# EAGLE board qo-100-pa-250W (EAGLE 9.6.2)
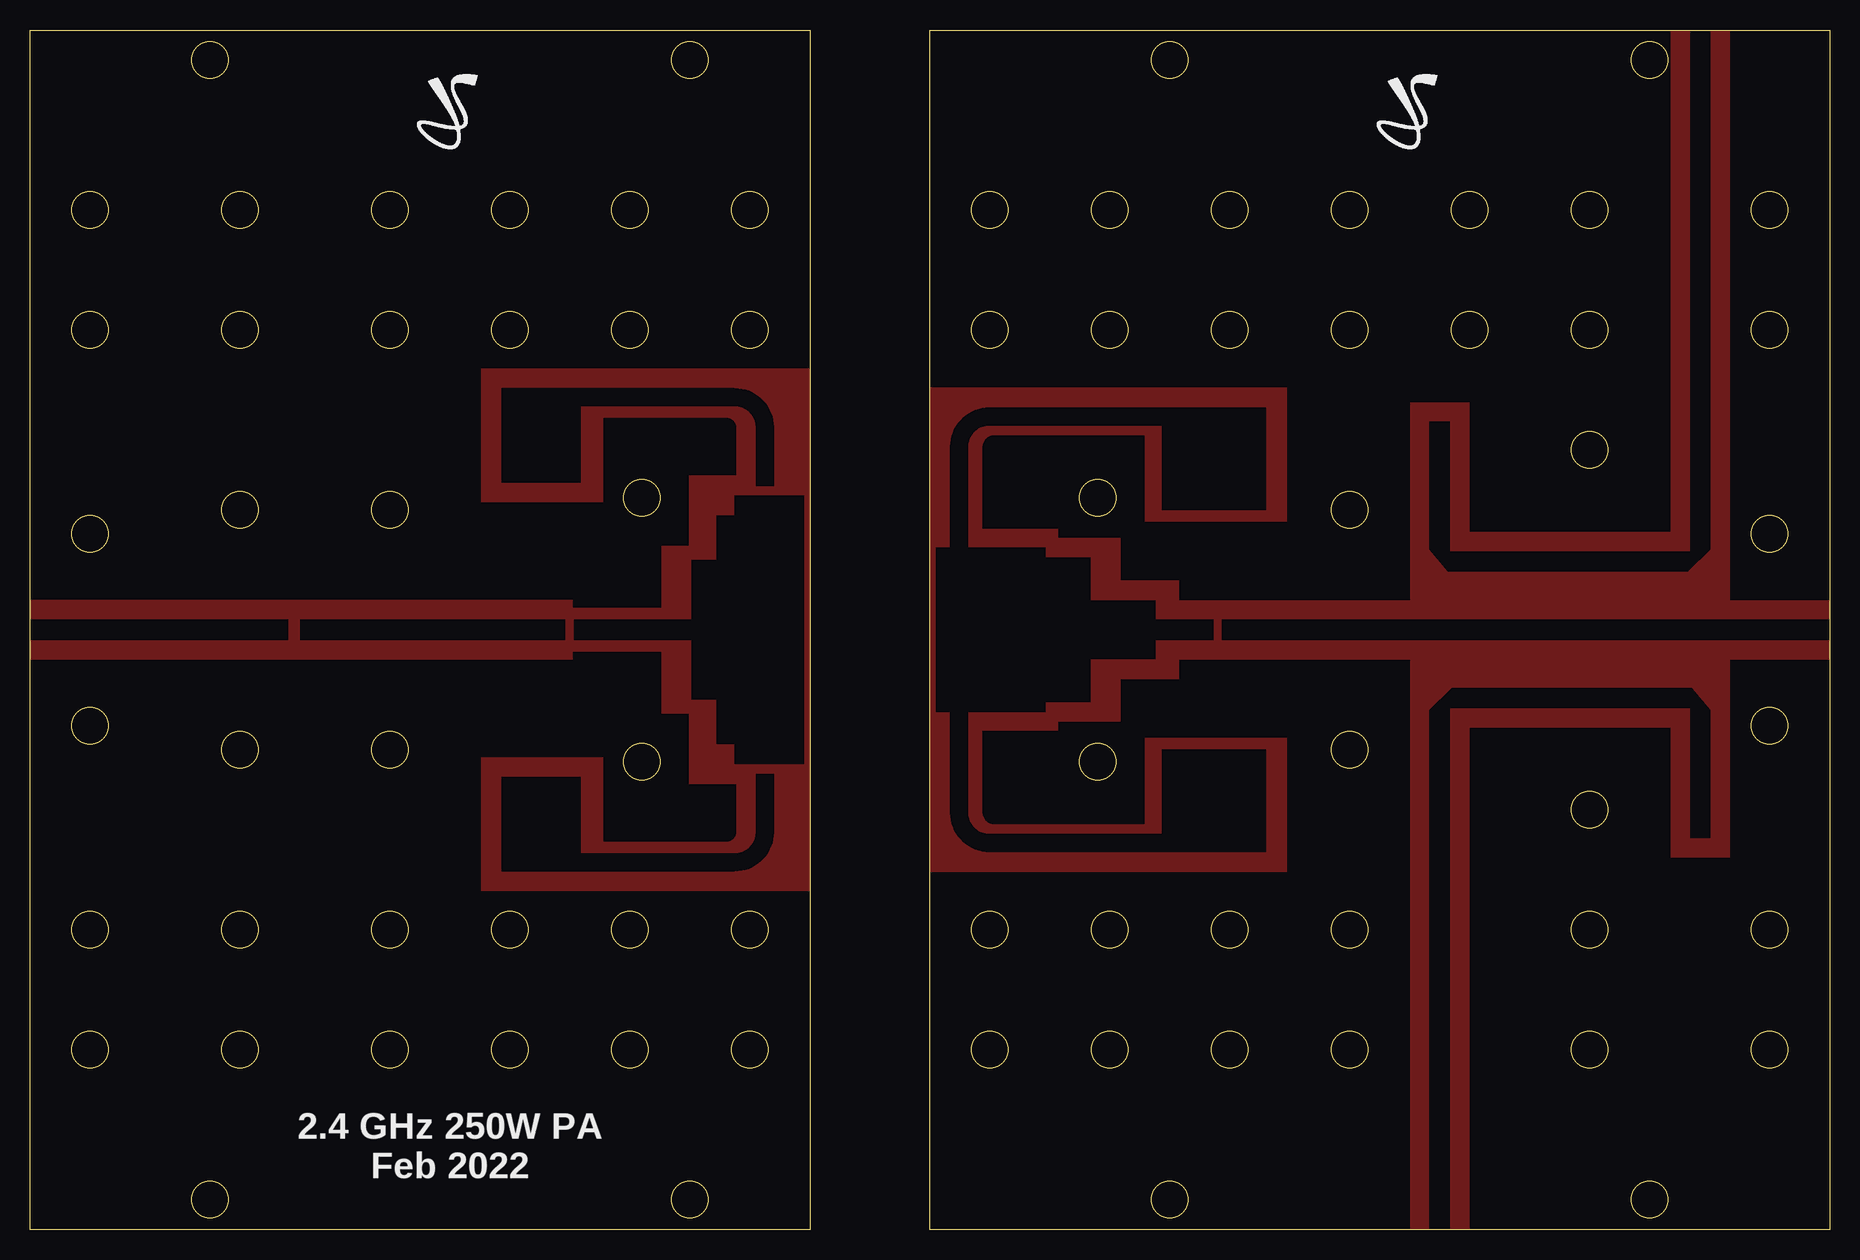
[diagram p0: board, top side]

Size 150 x 100 mm. Coordinates in mm from the lower left corner, seen from the top.
Outline: 0,0 0,100 65,100 65,0 0,0
Outline: 75,0 75,100 150,100 150,0 75,0
Outline: circle at 5,25 radius 1.5
Outline: circle at 17.5,25 radius 1.5
Outline: circle at 30,25 radius 1.5
Outline: circle at 40,25 radius 1.5
Outline: circle at 50,25 radius 1.5
Outline: circle at 60,25 radius 1.5
Outline: circle at 51,39 radius 1.5
Outline: circle at 30,40 radius 1.5
Outline: circle at 17.5,40 radius 1.5
Outline: circle at 5,42 radius 1.5
Outline: circle at 5,58 radius 1.5
Outline: circle at 17.5,60 radius 1.5
Outline: circle at 5,75 radius 1.5
Outline: circle at 17.5,75 radius 1.5
Outline: circle at 30,75 radius 1.5
Outline: circle at 40,75 radius 1.5
Outline: circle at 30,60 radius 1.5
Outline: circle at 51,61 radius 1.5
Outline: circle at 50,75 radius 1.5
Outline: circle at 60,75 radius 1.5
Copper layers (1*16): Top 0.035mm / dielectric 0.15mm / Bottom 0.035mm
Design rules "default *": minimum track width 6mil, minimum drill 0.35mm, track to track 0mil, track to pad 6mil, pad to pad 6mil, via to via 6mil, smd to smd 6mil, copper to edge 0mil, drill to drill 6mil, minimum pad ring 10mil, minimum via ring 8mil, stop-mask expansion 4mil, vias tented up to drill 0mil, thermal gap 10mil
Holes 3 mm at 5,25 40,25 50,25 60,25 5,75 40,75 50,75 60,75 51,61 51,39 80,75 90,75 100,75 110,75 80,25 90,25 100,25 110,25 110,60 110,40 89,39 89,61 145,75 135,2.5 145,58 145,42 130,25 120,75 130,75 130,35 130,65 30,25 17.5,25 30,60 5,58 5,42 17.5,40 30,40 17.5,60 17.5,75 30,75 145,25 95,2.5 15,2.5 55,2.5 5,15 40,15 50,15 60,15 30,15 17.5,15 5,85 40,85 50,85 60,85 17.5,85 30,85 80,85 90,85 100,85 110,85 145,85 120,85 130,85 80,15 90,15 100,15 110,15 130,15 145,15 135,97.5 95,97.5 15,97.5 55,97.5

## Placement (x,y rotation side)
E$1  [JS_5MM]  117.5,96.5 0 top
E$2  [JS_5MM]  37.5,96.5 0 top

## Library data of the parts
E$1 E$2 = Silkscreen

## Tracks (layer width: path | path; a pad name or v marks a point on that pad's centre or on a via)
BIAS
  cutout Top: 39.32,37.73 39.32,29.86 58.74,29.86 arc90 62,33.12 62,38 60.5,38 60.5,33.12 arc-90 58.74,31.36 45.9,31.36 45.9,37.73
  cutout Top: 78.2,56.86 78.2,65.26 arc-90 79.96,67.02 94.34,67.02 94.34,59.98 103,59.98 103,68.52 79.96,68.52 arc90 76.7,65.26 76.7,56.86
BIAS1
  cutout Top: 39.32,62.27 39.32,70.14 58.74,70.14 arc-90 62,66.88 62,62 60.5,62 60.5,66.88 arc90 58.74,68.64 45.9,68.64 45.9,62.27
BIAS2
  cutout Top: 78.2,43.14 78.2,34.74 arc90 79.96,32.98 94.34,32.98 94.34,40.02 103,40.02 103,31.48 79.96,31.48 arc-90 76.7,34.74 76.7,43.14
DRAIN
  cutout Top: 75.5,43.14 84.66,43.14 84.66,44 88.4,44 88.4,47.58 93.8,47.58 93.8,49.16 98.63,49.16 98.63,50.84 93.8,50.84 93.8,52.42 88.4,52.42 88.4,56 84.66,56 84.66,56.86 75.5,56.86
FWD
  cutout Top: 116.66,0 116.66,43.3 118.52,45.16 138.52,45.16 140.05,43.3 140.05,32.66 138.38,32.66 138.38,43.48 118.34,43.48 118.34,0
FWD1
  cutout Top: 140.05,100 140.05,56.7 138.2,54.84 118.2,54.84 116.66,56.7 116.66,67.34 118.34,67.34 118.34,56.52 138.38,56.52 138.38,100
GATE
  cutout Top: 45.34,49.16 55.12,49.16 55.12,44.2 57.22,44.2 57.22,40.47 58.73,40.47 58.73,38.79 64.5,38.79 64.5,61.21 58.73,61.21 58.73,59.53 57.22,59.53 57.22,55.8 55.12,55.8 55.12,50.84 45.34,50.84
GND
  cutout Top: 0,52.51 0,100 65,100 65,71.81 37.57,71.81 37.57,60.59 47.8,60.59 47.8,67.64 58.09,67.64 arc-90 58.85,66.88 58.85,62.89 54.89,62.89 54.89,57 52.62,57 52.62,51.84 45.25,51.84 45.25,52.51
  cutout Top: 0,47.49 0,0 65,0 65,28.19 37.57,28.19 37.57,39.41 47.8,39.41 47.8,32.36 58.09,32.36 arc90 58.85,33.12 58.85,37.11 54.89,37.11 54.89,43 52.62,43 52.62,48.16 45.25,48.16 45.25,47.49
  cutout Top: 75,0 115,0 115,47.5 95.83,47.5 95.83,45.84 90.95,45.84 90.95,42.32 85.73,42.32 85.73,41.56 79.4,41.56 79.4,34.79 arc90 80.4,33.79 92.9,33.79 92.9,41 104.8,41 104.8,29.78 75,29.78
  cutout Top: 120,0 120,41.82 136.72,41.82 136.72,31 141.72,31 141.72,47.5 150,47.5 150,0
  cutout Top: 150,52.5 141.72,52.5 141.72,100 150,100
GND1
  cutout Top: 75,100 136.72,100 136.72,58.18 120,58.18 120,69 115,69 115,52.5 95.83,52.5 95.83,54.16 90.95,54.16 90.95,57.68 85.73,57.68 85.73,58.44 79.4,58.44 79.4,65.21 arc-90 80.4,66.21 92.9,66.21 92.9,59 104.8,59 104.8,70.22 75,70.22
IN
  cutout Top: 22.5,50.84 22.5,49.16 44.62,49.16 44.62,50.84
IN1
  cutout Top: 150,49.16 150,50.84 99.36,50.84 99.36,49.16
IN2
  cutout Top: 0,50.84 0,49.16 21.5,49.16 21.5,50.84
NEGATIVE
  pour Top: 0,0 65,0 65,100 0,100
  pour Top: 75,0 75,100 150,100 150,0

## Text on the board
tPlace: 2.4 GHz 250W PA / Feb 2022